# Altium PCB inj_meas.PcbDoc
Units mm, origin at the board's own origin, x right, y up, seen from the top; angles counter-clockwise.
Board outline 66 x 50 mm, 2 copper layers (Top Layer, Bottom Layer); 87 components, 48 nets, 233 pads, 0 vias.
Unrouted connection lines stored in the file: 166.
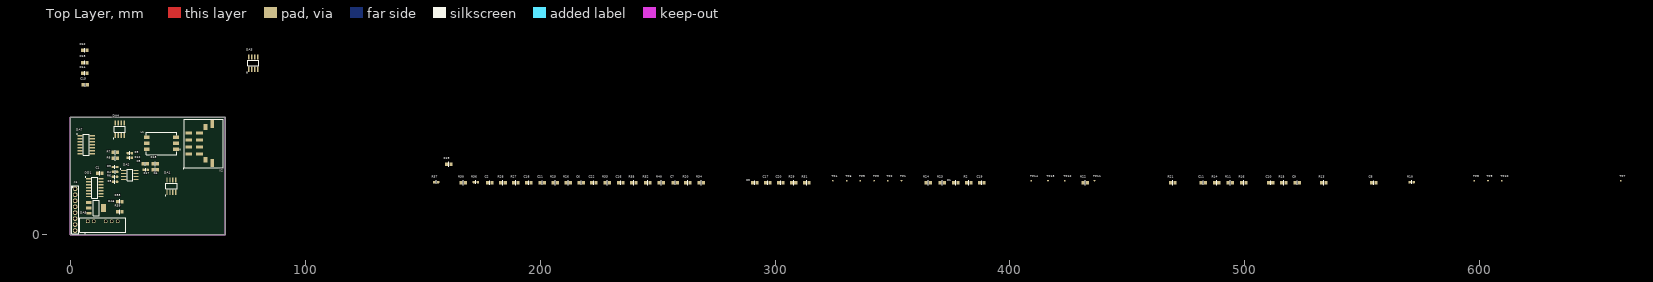
[diagram p0: Top Layer view]
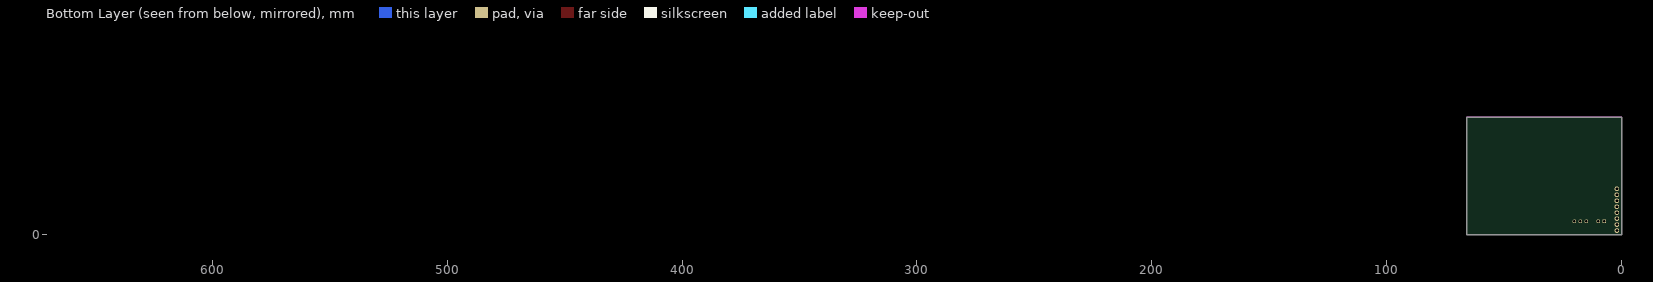
[diagram p1: Bottom Layer view, seen from below]

## Layer stack, top to bottom
Top Solder: solder mask 0.0102, Solder Resist, Dk 3.5
Top Layer: signal copper 0.0356
Dielectric 1: dielectric 0.32, FR-4, Dk 4.8
Bottom Layer: signal copper 0.0356
Bottom Solder: solder mask 0.0102, Solder Resist, Dk 3.5

## Board outline
0,0 66,0 66,50 0,50

## Design rules (kind name [scope] priority, off if disabled: settings)
Clearance [All] p1: gap=0.254 ignorepadtopadclearanceinfootprint=FALSE except(0: Arc-Hole Track-Hole SMDPad-Hole THPad-Hole Via-Hole Fill-Hole Poly-Hole Region-Hole Text-Hole)
PolygonConnect [All] p1: connectstyle=Relief reliefconductorwidth=0.254 reliefentries=4 polygonreliefangle="90 Angle" airgapwidth=0.254
RoutingVias [All] p1: holewidth=0.711 width=1.27 viastyle="Through Hole" minholewidth=0.711 minwidth=1.27 maxholewidth=0.711 maxwidth=1.27
SolderMaskExpansion [All] p1: expansion=0.102 istentingtop=FALSE
Width [All] p1: maxlimit=0.254 minlimit=0.254 preferedwidth=0.254
30 further rules are at their usual default settings.

## Classes and differential pairs
component class inj_meas: C1 C2 C5 C6 C8 C9 C10 C11 C12 C13 C15 DA1 DA3 DA4 DA5 DD1 L1 R1 R2 R4 R5 R7 R8 R9 R10 R11 R12 R14 R16 R17 R21 R23 R24 R25 R27 R32 R34 R35 R36 R37 R38 TP1 TP2 TP3 TP4 TP5 TP6 TP7 TP8 TP9 TP10 TP11 TP12 TP13 TP14 X1 X2

## Components (designator, comment, footprint, x,y, rotation, side; value= is the part's Value field where it differs from the comment)
C1 "0.1u 50V 0805 ±10%" "CAP: SMD 0805 MD IPC 782" 12.567,26.284 r180 top
C2 "6.8n 50V 0805 ±5%" "CAP: SMD 0805 MD IPC 782" 178.562,22.225 r0 top
C3 "6.8n 50V 0805 ±5%" "CAP: SMD 0805 MD IPC 782" 291.338,22.225 r0 top
C4 "6.8n 50V 0805 ±5%" "CAP: SMD 0805 MD IPC 782" 36,27.7 r0 top
C5 "0.1u 50V 0805 ±10%" "CAP: SMD 0805 MD IPC 782" 31.75,30.2 r0 top
C6 "6.8n 50V 0805 ±5%" "CAP: SMD 0805 MD IPC 782" 217.424,22.225 r0 top
C7 "6.8n 50V 0805 ±5%" "CAP: SMD 0805 MD IPC 782" 257.429,22.225 r0 top
C8 "0.1u 50V 0805 ±10%" "CAP: SMD 0805 MD IPC 782" 554.863,22.225 r0 top
C9 "0.1u 50V 0805 ±10%" "CAP: SMD 0805 MD IPC 782" 522.351,22.225 r0 top
C10 "0.1u 50V 0805 ±10%" "CAP: SMD 0805 MD IPC 782" 510.921,22.225 r0 top
C11 "0.1u 50V 0805 ±10%" "CAP: SMD 0805 MD IPC 782" 482.346,22.225 r0 top
C12 "0.1u 50V 0805 ±10%" "CAP: SMD 0805 MD IPC 782" 6.01,78.575 r0 top
C13 "0.1u 50V 0805 ±10%" "CAP: SMD 0805 MD IPC 782" 6.01,73.375 r0 top
C14 "0.1u 50V 0805 ±10%" "CAP: SMD 0805 MD IPC 782" 6.05,68.8 r0 top
C15 "0.1u 50V 0805 ±10%" "CAP: SMD 0805 MD IPC 782" 6.331,63.825 r0 top
C16 "0.01u 50V 0805 ±5%" "CAP: SMD 0805 MD IPC 782" 234.315,22.225 r0 top
C17 "10u 50V 0805 ±10%" "CAP: SMD 0805 MD IPC 782" 296.799,22.225 r0 top
C18 "10u 50V 0805 ±10%" "CAP: SMD 0805 MD IPC 782" 195.199,22.225 r0 top
C19 "0.1u 50V 0805 ±10%" "CAP: SMD 0805 MD IPC 782" 387.985,22.225 r0 top
C20 "0.1u 50V 0805 ±10%" "CAP: SMD 0805 MD IPC 782" 302.387,22.225 r0 top
C21 "0.1u 50V 0805 ±10%" "CAP: SMD 0805 MD IPC 782" 200.787,22.225 r0 top
C22 "6.8n 50V 0805 ±5%" "CAP: SMD 0805 MD IPC 782" 222.885,22.225 r0 top
DA1 "AD8028" "IC: SOIC 8" 43,20.8 r90 top
DA2 "AD8028" "IC: SOIC 8" 25.3,25.5 r0 top
DA3 "AD8028" "IC: SOIC 8" 77.851,73.152 r90 top
DA4 "AD8028" "IC: SOIC 8" 21,45 r90 top
DA5 "DPU01L-12" SIP-6 15,4 r0 top
DA6 "AMS 1117-3.3" "IC: SOT 223" 10.9,11.5 r0 top
DA7 "LF398" "IC: SOIC 14" 6.7,38.395 r0 top
DD1 "4093" "IC: SOIC 14" 10.405,20.105 r0 top
L1 "SM-LP-5001" "IND: SM-LP-5001E" 39,39 r180 top
R1 "2k ±1% 0805" "RES: SMD 0805 MD IPC 782" 376.936,22.225 r0 top
R2 "2k ±1% 0805" "RES: SMD 0805 MD IPC 782" 382.397,22.225 r0 top
R3 "680 ±1% 0603" "RES: SMD 0603 MD IPC 782" 18.959,28.877 r0 top
R4 "680 ±1% 0603" "RES: SMD 0603 MD IPC 782" 18.975,26.821 r0 top
R5 "680 ±1% 0603" "RES: SMD 0603 MD IPC 782" 18.962,22.623 r0 top
R6 "680 ±1% 0603" "RES: SMD 0603 MD IPC 782" 18.962,24.743 r0 top
R7 "0 ±1% 0805" "RES: SMD 0805 MD IPC 782" 19.1,35.1 r0 top
R8 "0 ±1% 0805" "RES: SMD 0805 MD IPC 782" 19.1,32.6 r0 top
R9 "1k ±1% 0603" "RES: SMD 0603 MD IPC 782" 25.3,34.8 r0 top
R10 "1k ±1% 0603" "RES: SMD 0603 MD IPC 782" 570.992,22.479 r0 top
R11 "1k ±1% 0805" "RES: SMD 0805 MD IPC 782" 493.776,22.225 r0 top
R12 "3k ±1% 0603" "RES: SMD 0603 MD IPC 782" 25.25,32.8 r0 top
R13 "2k ±1% 0805" "RES: SMD 0805 MD IPC 782" 533.527,22.225 r0 top
R14 "1k ±1% 0805" "RES: SMD 0805 MD IPC 782" 487.934,22.225 r0 top
R15 "2k ±1% 0805" "RES: SMD 0805 MD IPC 782" 516.509,22.225 r0 top
R16 "2k ±1% 0805" "RES: SMD 0805 MD IPC 782" 499.618,22.225 r0 top
R17 "200 ±1% 0603" "RES: SMD 0603 MD IPC 782" 32,27.7 r0 top
R18 "1k ±1% 0805" "RES: SMD 0805 MD IPC 782" 36,30.2 r180 top
R19 "3k ±1% 0805" "RES: SMD 0805 MD IPC 782" 161,30.1 r0 top
R20 "3k ±1% 0805" "RES: SMD 0805 MD IPC 782" 262.89,22.225 r0 top
R21 "0 ±1% 0805" "RES: SMD 0805 MD IPC 782" 469.265,22.225 r0 top
R22 "0 ±1% 0805" "RES: SMD 0805 MD IPC 782" 432.054,22.225 r0 top
R23 "0 ±1% 0805" "RES: SMD 0805 MD IPC 782" 371.094,22.225 r0 top
R24 "0 ±1% 0805" "RES: SMD 0805 MD IPC 782" 365.125,22.225 r0 top
R25 "100R±1%  0805" "RES: SMD 0805 MD IPC 782" 206.375,22.225 r0 top
R26 "1k ±1% 0805" "RES: SMD 0805 MD IPC 782" 211.836,22.225 r0 top
R27 "820k ±1% 0805" "RES: SMD 0805 MD IPC 782" 189.611,22.225 r0 top
R28 "510 ±1% 0805" "RES: SMD 0805 MD IPC 782" 184.15,22.225 r0 top
R29 "510 ±1% 0805" "RES: SMD 0805 MD IPC 782" 307.848,22.225 r0 top
R30 "510 ±1% 0805" "RES: SMD 0805 MD IPC 782" 167.259,22.225 r0 top
R31 "510 ±1% 0805" "RES: SMD 0805 MD IPC 782" 313.436,22.225 r0 top
R32 "300 ±1%  0805" "RES: SMD 0805 MD IPC 782" 245.745,22.225 r0 top
R33 "3k ±1% 0805" "RES: SMD 0805 MD IPC 782" 228.473,22.225 r0 top
R34 "3k ±1% 0805" "RES: SMD 0805 MD IPC 782" 268.478,22.225 r0 top
R35 "3k ±1% 0805" "RES: SMD 0805 MD IPC 782" 239.903,22.225 r0 top
R36 "0" "RES: SMD 0603 MD IPC 782" 172.593,22.479 r0 top
R37 "0" "RES: SMD 0603 MD IPC 782" 155.702,22.479 r0 top
R38 "1k ±1% 0805" "RES: SMD 0805 MD IPC 782" 20.9,14.2 r0 top
R39 "1k ±1% 0805" "RES: SMD 0805 MD IPC 782" 21,9.8 r0 top
R40 "300 ±1%  0805" "RES: SMD 0805 MD IPC 782" 251.587,22.225 r0 top
TP1 "Test point" "Test Point" 353.822,23.114 r90 top net-tie
TP2 "Test point" "Test Point" 347.98,23.114 r90 top net-tie
TP3 "Test point" "Test Point" 342.138,23.114 r90 top net-tie
TP4 "Test point" "Test Point" 324.612,23.114 r90 top net-tie
TP5 "Test point" "Test Point" 336.296,23.114 r90 top net-tie
TP6 "Test point" "Test Point" 330.454,23.114 r90 top net-tie
TP7 "Test point" "Test Point" 660.019,23.114 r90 top net-tie
TP8 "Test point" "Test Point" 597.662,23.114 r90 top net-tie
TP9 "Test point" "Test Point" 603.504,23.114 r90 top net-tie
TP10 "Test point" "Test Point" 609.346,23.114 r90 top net-tie
TP11 "Test point" "Test Point" 435.991,23.114 r90 top net-tie
TP12 "Test point" "Test Point" 423.291,23.114 r90 top net-tie
TP13 "Test point" "Test Point" 416.179,23.114 r90 top net-tie
TP14 "Test point" "Test Point" 409.067,23.114 r90 top net-tie
X1 "PLS-8" "CON: 8PIN PLS-8" 2,10.715 r270 top
X2 "Micro-Fit 3.0 43045-0809" "CON: 8PIN Molex Microfit 43045-0809" 60,39 r90 top

## Footprints (in the part's own frame and the unit in brackets; to place one, negate y for a bottom-side part, rotate by r counter-clockwise, add the part's x,y. Pads: shape width x height; smd on the part's side, far side on the other; paste and mask are expansions set on the pad)
"CAP: SMD 0805 MD IPC 782" [mm]
  rect 1.3x1.5 smd: 1(-0.95,0) 2(0.95,0)
  silkscreen extent 0,-0.8 0,0.8, body extent -1.4,-0.63 1.4,0.63, height 0.8
"CON: 8PIN Molex Microfit 43045-0809" [mm]
  rect 3.43x1.65 smd: 0(-8.35,-0.35) 0(8.25,-0.35)
  rect 2.45x1.6 smd: 0(-7.05,2.5) 0(6.95,2.5)
  rect 1.27x2.92 smd: 1(4.45,5) 2(1.45,5) 3(-1.55,5) 4(-4.55,5) 5(4.45,9.625) 6(1.45,9.625) 7(-1.55,9.625) 8(-4.55,9.625)
  silkscreen extent -10.84,-5.1 10.25,11.97, body extent -9.82,-4.96 9.83,10.44, height 8.83
"CON: 8PIN PLS-8" [mm]
  round 2 hole 1.2: 1(-8.905,0) 2(-6.365,0) 3(-3.825,0) 4(-1.285,0) 5(1.255,0) 6(3.795,0) 7(6.335,0) 8(8.875,0)
  silkscreen extent -10.27,-1.38 10.29,1.42, body extent -10.16,-1.27 10.16,1.27, height 9.2
"IC: SOIC 8" [mm]
  rect 2.25x0.6 smd: 1(-2.6,1.905) 2(-2.6,0.635) 3(-2.6,-0.635) 4(-2.6,-1.905) 5(2.6,-1.905) 6(2.6,-0.635) 7(2.6,0.635) 8(2.6,1.905)
  silkscreen extent -4.1,-2.4 1.2,2.7, body extent -3.05,-2.45 2.95,2.45, height 1.75
"IC: SOIC 14" [mm]
  rect 2.2x0.6 smd: 1(-2.6,3.845) 2(-2.6,2.575) 3(-2.6,1.305) 4(-2.6,0.035) 5(-2.6,-1.235) 6(-2.6,-2.505) 7(-2.6,-3.775) 8(2.6,-3.775) 9(2.6,-2.505) 10(2.6,-1.235) 11(2.6,0.035) 12(2.6,1.305) 13(2.6,2.575) 14(2.6,3.845)
  silkscreen extent -4.02,-4.4 1.25,4.7, body extent -3,-4.37 3,4.32, height 1.6
"IC: SOT 223" [mm]
  rect 2.2x1.2 smd: 1(-3.1,2.3) 2(-3.1,0) 3(-3.1,-2.3)
  rect 2.2x3.5 smd: 4(3.1,0)
  silkscreen extent -1.3,-3.35 1.3,3.35, body extent -3.48,-3.25 3.48,3.25, height 1.9
"IND: SM-LP-5001E" [mm]
  rect 2.5x1.5 smd: 1(-6,2.54) 2(-6,0) 3(-6,-2.54) 4(6.5,-2.54) 5(6.5,0) 6(6.5,2.54)
  silkscreen extent -7.75,-4.8 6.65,4.8, body extent -6.62,-4.55 7.38,4.8, height 7.38
"RES: SMD 0603 MD IPC 782" [mm]
  rrect50% 1.1x1 smd: 1(-0.85,0) 2(0.85,0)
  silkscreen extent 0,-0.75 0,0.75, body extent -1.23,-0.4 1.23,0.4, height 0.8
"RES: SMD 0805 MD IPC 782" [mm]
  rect 1.3x1.5 smd: 1(-0.95,0) 2(0.95,0)
  silkscreen extent 0,-1 0,1, body extent -1.4,-0.62 1.4,0.63, height 0.8
SIP-6 [mm]
  rect 1.575x1.575 hole 1.05: 1(-7.62,1.778)
  round 1.575 hole 1.05: 2(-5.08,1.778) 4(0,1.778) 5(2.54,1.778) 6(5.08,1.778)
  silkscreen extent -10.97,-3.55 8.53,3.23, body extent -10.96,-2.85 8.54,3.25, height 10.55
"Test Point" [mm]
  round 0.7 smd: 1(0,0)

## Part data
DA1 DA2 DA3 DA4: library part AD8028_part
DA5: library part "DC-DC: +12/-12V DPU01L-12", Code=6339113551, Name="Микросхема AM2D-0512DZ, AIMTEC"
DA6: library part "LDO: 15-3.3V AMS1117", Code=6339112951, Name="Микросхема AMS-1117-3.3"
DA7: library part LF398MX
DD1: library part "LOGIC: 4093", "&", Code=6330002931, Name="Микросхема IW4093BD, ТУ РБ 14513714.005-03-95"
R25: library part "100 ±1%  0805", Code=6094351171, Name="Резистор 100R±1%  0805"
R36 R37: library part "0 ±5%", Code=6020004221, Name="Резистор RC0603JR-070RL, Yageo"
X1: library part "8 pin PLS 8"
X2: library part "8 pin MicroFit DR R SMD Molex", Code=6319244781, Name="Micro-Fit 3.0 43045-0809"
C1 C5 C8 C9 C10 C11 C12 C13 C14 C15 C19 C20 C21: Code=6279254871, Name="Конденсатор X7R 50V 0,1uF ±10% 0805"
C2 C3 C4 C6 C7 C22: Code=6279352311, Name="Конденсатор NPO 50V 6800pF ±5% 0805"
C16: Code=6279261451, Name="Конденсатор X7R 50V  0,01uF±5%  0805"
C17 C18: Code=6289735441, Name="Конденсатор 12065D106KAT2A, AVX"
R1 R2 R13 R15 R16: Code=6094352561, Name="Резистор 2k±1%  0805"
R3 R4 R5 R6: Code=6069180761, Name="Резистор 680R ±1% 0603"
R7 R8 R21 R22 R23 R24: Code=6094342239, Name="Резистор 0R ±1% 0805"
R9 R10: Code=6069174188, Name="Резистор 1k ±1% 0603"
R11 R14 R18 R26 R38 R39: Code=6027158691, Name="Резистор RC0805FR-071KL, Yageo"
R12: Code=6094357331, Name="Резистор 3К ±1% 0603"
R17: Code=6069180621, Name="Резистор 200R±1% 0603"
R19 R20 R33 R34 R35: Code=6094357331, Name="Резистор 3К ±1% 0805"
R27: Code=6019041741, Name="Резистор RC0805FR-07820KL, Yageo"
R28 R29 R30 R31: Code=6069137191, Name="Резистор 510R±1%  0805"
R32 R40: Code=6094357025, Name="Резистор 300R±1%  0805"

## Nets (pads, with @x,y where several pads share a name; then routed paths per layer and width w, separated by ;. In a path a pad name is that pad's centre, name@x,y a point inside that pad or via, vN(x,y) a via of type N, cw(c..) or ccw(c..) an arc to the next point about the centre after c; other vN are vias at no path point)
+1.65: C19.1 R7.2 R38.1 R39.2
+3.3: DA6.2 DA6.4 R38.2
+5: C1.1 DA5.1 DA6.3 DD1.14 TP5.1 X1.6
+12: C12.2 C13.2 C14.2 C15.2 C18.1 C21.1 DA1.8 DA2.8 DA3.8 DA4.8 DA5.6 DA7.12
-12: C8.2 C9.2 C10.2 C11.2 C17.1 C20.1 DA1.4 DA2.4 DA3.4 DA4.4 DA5.4 DA7.3
GNDA: C1.2 C4.2 C6.2 C8.1 C9.1 C10.1 C11.1 C12.1 C13.1 C14.1 C15.1 C16.2 C17.2 C18.2 C19.2 C20.2 C21.2 C22.2 DA1.5 DA5.2 DA5.5 DA6.1 DA7.10 DD1.7 R8.1 R16.2 R18.1 R19.2 R20.2 R30.1 R33.2 R35.1 R39.1 TP4.1 X1.8 X2.5 X2.6 X2.7 X2.8
GNDD: R10.1 TP6.1 X1.7
I1: R21.2 R22.2 TP11.1 X2.1
I2: R23.2 R24.2 TP12.1 X2.2
NetC2_1: C2.1 DA3.5 R19.1
NetC3_1: C3.1 DA3.3 R20.1
NetC4_1: C4.1 C5.2 R17.2 TP10.1
NetC5_1: C5.1 R15.2 R18.2
NetC6_1: C6.1 C7.2 R32.2
NetC7_1: C7.1 DA4.5 R33.1
NetC16_1: C16.1 DA7.8
NetDA1_1: DA1.1 DA1.2 R1.1
NetDA1_3: DA1.3 L1.4 R11.2 R14.1 R21.1
NetDA1_6: DA1.6 R1.2 R2.1
NetDA1_7: DA1.7 L1.1 R2.2 R24.1
NetDA2_1: DA2.1 R12.2 R17.1 TP9.1
NetDA2_2: DA2.2 R9.2 R12.1
NetDA2_3: DA2.3 R3.2 R4.2 R5.2 R6.2 R10.2 TP8.1
NetDA2_5: DA2.5 R14.2 R16.1
NetDA2_6: DA2.6 R13.2 R15.1
NetDA2_7: DA2.7 R11.1 R13.1
NetDA3_1: DA3.1 R26.1 R29.1
NetDA3_2: DA3.2 R25.2 R26.2
NetDA3_6: DA3.6 R25.1 R27.2
NetDA3_7: DA3.7 R27.1 R28.1
NetDA4_1: DA4.1 R31.2 R32.1
NetDA4_2: DA4.2 R29.2 R31.1
NetDA4_3: DA4.3 R28.2 R30.2
NetDA4_6: DA4.6 DA4.7 R34.1
NetDA7_1: DA7.1 R34.2 R35.2
NetDA7_7: DA7.7 R40.1
NetDA7_11: DA7.11 R36.1 R37.1
NetL1_2: L1.2 R23.1
NetL1_3: L1.3 R22.1
NetR7_1: R7.1 R8.2 R9.1 TP7.1
"OFF ADJ": DA7.14 X1.4
PWR1: DD1.1 DD1.2 R3.1 R36.2 TP1.1 X1.1
PWR2: DD1.5 DD1.6 R4.1 R37.2 TP2.1 X1.2
PWR_1: DD1.3 R5.1
PWR_2: DD1.4 R6.1
U1: C3.2 TP13.1 X2.3
U2: C2.2 TP14.1 X2.4
U_H: C22.1 R40.2 TP3.1 X1.3
pads on no net: DA7.2 DA7.4 DA7.5 DA7.6 DA7.9 DA7.13 DD1.8 DD1.9 DD1.10 DD1.11 DD1.12 DD1.13 L1.5 L1.6 X1.5 X2.0

## Keep-outs
Keep-Out Layer:
  the board outline again, w0.01

## Silkscreen, mask and mechanical layers (free items; w line width, h text height)
Top Solder:
  the board outline again, w0.1
Bottom Solder:
  the board outline again, w0.1